# Altium PCB Preamp.PcbDoc
Units mm, origin at the board's own origin, x right, y up, seen from the top; angles counter-clockwise.
Board outline 152.4 x 101.6 mm, 2 copper layers (Top Layer, Bottom Layer); 34 components, 16 nets, 136 pads, 18 vias.
Unrouted connection lines stored in the file: 69.
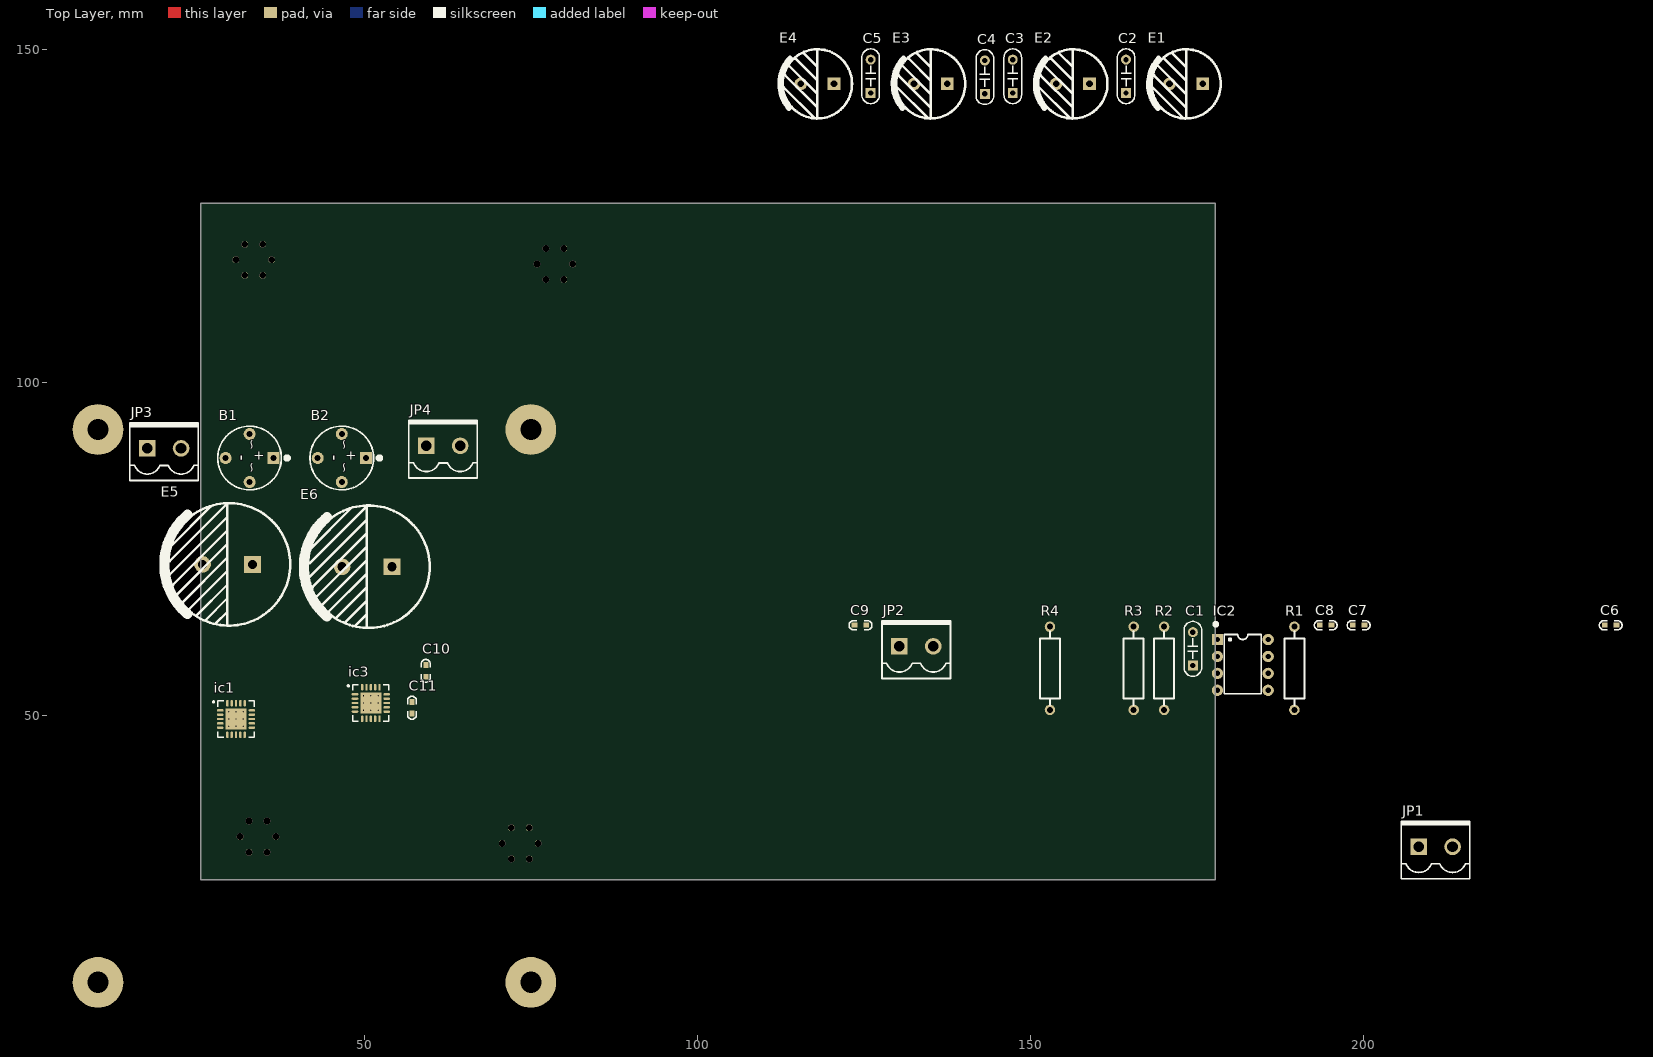
[diagram p0: Top Layer view]
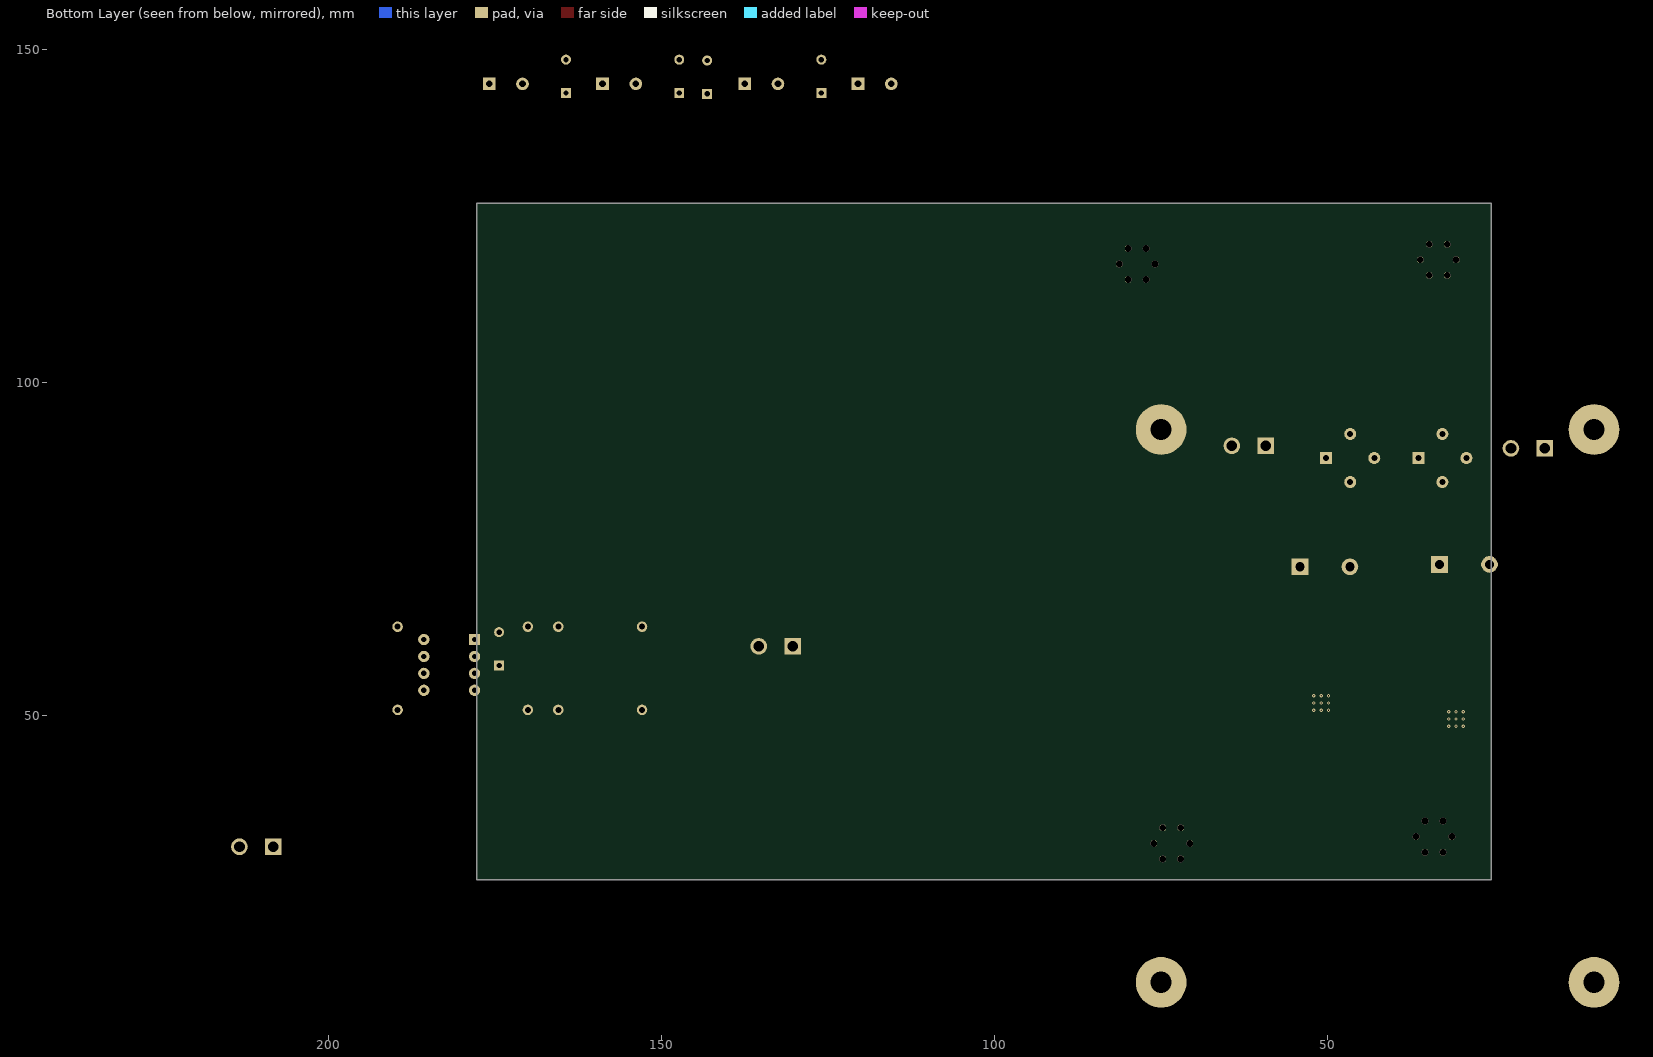
[diagram p1: Bottom Layer view, seen from below]

## Layer stack, top to bottom
Top Solder: solder mask 0.0102, Solder Resist, Dk 3.5
Top Layer: signal copper 0.0356
Dielectric 1: dielectric 0.32, FR-4, Dk 4.8
Bottom Layer: signal copper 0.0356
Bottom Solder: solder mask 0.0102, Solder Resist, Dk 3.5

## Board outline
25.4,25.4 177.8,25.4 177.8,127 25.4,127

## Design rules (kind name [scope] priority, off if disabled: settings)
Clearance [All] p1: gap=0.254 ignorepadtopadclearanceinfootprint=FALSE except(0: Arc-Hole Track-Hole SMDPad-Hole THPad-Hole Via-Hole Fill-Hole Poly-Hole Region-Hole Text-Hole)
PolygonConnect [All] p1: connectstyle=Relief reliefconductorwidth=0.254 reliefentries=4 polygonreliefangle="90 Angle" airgapwidth=0.254
RoutingVias [All] p1: holewidth=0.711 width=1.27 viastyle="Through Hole" minholewidth=0.711 minwidth=1.27 maxholewidth=0.711 maxwidth=1.27
SolderMaskExpansion [All] p1: expansion=0.102
Width [All] p1: maxlimit=0.254 minlimit=0.254 preferedwidth=0.254
30 further rules are at their usual default settings.

## Classes and differential pairs
component class Preamp: B1 B2 C1 C2 C3 C4 C5 C6 C7 C8 C9 C10 C11 E1 E2 E3 E4 E5 E6 ic1 IC2 ic3 JP1 JP2 JP3 JP4 R1 R2 R3 R4 ""

## Components (designator, comment, footprint, x,y, rotation, side; value= is the part's Value field where it differs from the comment)
* "M3" "M3 125X300"#1 33.401,118.491 r0 top
*1 "M3" "M3 125X300"#2 78.613,117.856 r0 top
*2 "M3" "M3 125X300"#3 34.036,31.877 r0 top
*3 "M3" "M3 125X300"#4 73.406,30.861 r0 top
B1 "2W10" RB-20 32.766,88.727 r270 top
B2 "2W10" RB-20 46.609,88.727 r270 top
C1 "0.1uF/275V" CBB-CL71 174.417,60.071 r90 top
C2 "0.1uF/275V" CBB-CL71 164.384,146.05 r90 top
C3 "0.1uF/275V" CBB-CL71 147.366,146.05 r90 top
C4 "0.1uF/275V" CBB-CL71 143.175,145.923 r90 top
C5 "0.1uF/275V" CBB-CL71 126.03,146.05 r90 top
C6 "104" "C 0603" 237.155,63.627 r0 top
C7 "104" "C 0603" 199.309,63.627 r0 top
C8 "104" "C 0603" 194.356,63.627 r0 top
C9 "104" "C 0603" 124.506,63.627 r0 top
C10 "104" "C 0603" 59.228,56.769 r90 top
C11 "104" "C 0603" 57.15,51.227 r90 top
E1 "10UF/6.3V" "CS 5.0*10*13 - C" 173.401,144.907 r0 top
E2 "10UF/6.3V" "CS 5.0*10*13 - C" 156.383,144.907 r0 top
E3 "10UF/6.3V" "CS 5.0*10*13 - C" 135.047,144.907 r0 top
E4 "10UF/6.3V" "CS 5.0*10*13 - C" 118.029,144.907 r0 top
E5 "10UF/16V" "CAP 7.5*18*35.5" 29.418,72.746 r180 top
E6 "10UF/16V" "CAP 7.5*18*35.5" 50.373,72.39 r180 top
ic1 "tps7a47" QFN65P500X500X100_HS-21N 30.734,49.53 r0 top
IC2 "OP07" DIP8-300 181.91,57.658 r0 top
ic3 "tps7a47" QFN65P500X500X100_HS-21N 50.973,51.943 r0 top
JP1 "HDR-1X2" KF2EDGK5.08-2P 208.326,30.353 r0 top
JP2 "HDR-1X2" KF2EDGK5.08-2P 130.348,60.452 r0 top
JP3 "HDR-1X2" KF2EDGK5.08-2P 17.399,90.17 r0 top
JP4 "HDR-1X2" KF2EDGK5.08-2P 59.309,90.551 r0 top
R1 "Rz" "RS 1/2W" 189.657,57.15 r90 top
R2 "Ri" "RS 1/2W" 170.099,57.15 r90 top
R3 "Ro" "RS 1/2W" 165.527,57.15 r90 top
R4 "Rg" "RS 1/2W" 152.954,57.15 r90 top

## Footprints (in the part's own frame and the unit in brackets; to place one, negate y for a bottom-side part, rotate by r counter-clockwise, add the part's x,y. Pads: shape width x height; smd on the part's side, far side on the other; paste and mask are expansions set on the pad)
"C 0603" [mil] "无极性贴片电容"
  rect 35x30 smd: 1(-35,0) 2(34,0)
  silkscreen extent -67,-26 67,26, body extent -31,-16 31,16, height 32
"CAP 7.5*18*35.5" [mm] "脚距7.5mm直径18mm高度35.5mm"
  rect 2.5x2.5 hole 1.4: 1(-3.78,0)
  round 2.5 hole 1.4: 2(3.72,0)
  silkscreen extent -9.45,-9.21 9.45,9.18, body extent -9,-9 9.01,9, height 35.54
CBB-CL71 [mm] "7.2mm*2.3mm*6.5mm(长*宽*高）"
  rect 1.5x1.5 hole 0.8: 1(-2.5,0)
  round 1.5 hole 0.8: 2(2.5,0)
  silkscreen extent -4.11,-1.32 4.11,1.32, body extent -3.6,-1.15 3.6,1.15, height 6.55
"CS 5.0*10*13 - C" [mm] "脚距5mm , 直径10mm , 高13mm"
  rect 1.9x1.9 hole 1: 1(2.5,0)
  round 1.9 hole 1: 2(-2.5,0)
  silkscreen extent -5.64,-5.2 5.2,5.2, body extent -5,-5 5,5, height 13.02
DIP8-300 [mm] "9.4*7.6*3.8(长宽高）"
  rect 1.7x1.7 hole 0.8: 1(-3.81,3.81)
  round 1.7 hole 0.8: 2(-3.81,1.27) 3(-3.81,-1.27) 4(-3.81,-3.81) 5(3.81,-3.81) 6(3.81,-1.27) 7(3.81,1.27) 8(3.81,3.81)
  silkscreen extent -4.32,-4.32 2.79,6.35, body extent -3.93,-4.7 3.93,4.7, height 4.5
KF2EDGK5.08-2P [mm] "直列插拔式端子"
  rect 2.5x2.5 hole 1.6: 1(0,0)
  round 2.5 hole 1.6: 2(5.08,0)
  silkscreen extent -2.62,-4.83 7.67,3.81, body extent -2.54,-4.75 7.62,3.75, height 11.25
"M3 125X300"#1 [mil] "M3螺丝孔，孔125Mil，焊盘300Mil"
  round 300 hole 125: 1(-921.3,-1003.58)
  round 40 hole 40: 6(-106,0) 7(-53,-91.8) 8(53,-91.8) 9(106,0) 10(53,91.8) 11(-53,91.8)
"M3 125X300"#2 [mil] "M3螺丝孔，孔125Mil，焊盘300Mil"
  round 300 hole 125: 1(-142.24,-978.58)
  round 40 hole 40: 6(-106,0) 7(-53,-91.8) 8(53,-91.8) 9(106,0) 10(53,91.8) 11(-53,91.8)
"M3 125X300"#3 [mil] "M3螺丝孔，孔125Mil，焊盘300Mil"
  round 300 hole 125: 1(-946.3,-861.3)
  round 40 hole 40: 6(-106,0) 7(-53,-91.8) 8(53,-91.8) 9(106,0) 10(53,91.8) 11(-53,91.8)
"M3 125X300"#4 [mil] "M3螺丝孔，孔125Mil，焊盘300Mil"
  round 300 hole 125: 1(62.76,-821.3)
  round 40 hole 40: 6(-106,0) 7(-53,-91.8) 8(53,-91.8) 9(106,0) 10(53,91.8) 11(-53,91.8)
QFN65P500X500X100_HS-21N [mm] "QFN, 20-Leads, Body 5.00x5.00mm, Pitch 0.65mm, Thermal Pad 3.15x3.15mm, IPC Medium Density"
  oval 1x0.35 smd: 1(-2.375,1.3) 2(-2.375,0.65) 3(-2.375,0) 4(-2.375,-0.65) 5(-2.375,-1.3) 11(2.375,-1.3) 12(2.375,-0.65) 13(2.375,0) 14(2.375,0.65) 15(2.375,1.3)
  oval 0.35x1 smd: 6(-1.3,-2.375) 7(-0.65,-2.375) 8(0,-2.375) 9(0.65,-2.375) 10(1.3,-2.375) 16(1.3,2.375) 17(0.65,2.375) 18(0,2.375) 19(-0.65,2.375) 20(-1.3,2.375)
  rect 3.15x3.15 smd: 21(0,0)
  silkscreen extent -3.5,-2.73 2.73,2.72, body extent -2.57,-2.58 2.58,2.57, height 1
RB-20 [mm] "8.9*3.5mm(直径，高)"
  round 1.8 hole 0.9: AC1(3.606,0) AC2(-3.606,0) DC-(0,-3.606)
  rect 1.8x1.8 hole 0.9: DC+(0,3.606)
  silkscreen extent -4.77,-4.77 4.77,5.89, body extent -4.62,-4.62 4.63,4.63, height 5.35
"RS 1/2W" [mm] "直插色环电阻，脚距12.5mm，直径3mm"
  round 1.575 hole 0.9: 1(-6.25,0) 2(6.25,0)
  silkscreen extent -5.5,-1.5 5.5,1.5, body extent -6.5,-1.51 6.5,1.51, height 3.11

## Part data
* *1 *2 *3: "?琖ふ", BOM¦W?=?琖ふ, ???方=www.ooocke.com, ª©???=·½?«È
B1 B2: "1KV/2A整流桥"
C1 C2 C3 C4 C5: library part C-CBB, "CBB电容", BOM名称=CBB电容, 版权归属=源创客, 学习资源=www.ooocke.com
C6 C7 C8 C9 C10 C11: library part C, "无极性贴片电容"
E1 E2 E3 E4: library part C-CS, "直插固态电容"
E5 E6: library part C-CAP, "直插电解电容"
ic1 ic3: "TI RF LDO Voltage Regulator", Supplier 1=Arrow
IC2: "?路精密?放", BOM¦W?=?路精密?放, ???方=www.ooocke.com, ª©???=·½?«È
JP1 JP2 JP3 JP4: library part "Header 2", "2P接插件", BOM名称=2P接插件, 版权归属=源创客, 学习资源=www.ooocke.com
R1 R2 R4: library part R-CRR, "直插色环电阻"
R3: library part R-CRR

## Via types
v1: diameter 0.5, hole 0.2, Top Layer to Bottom Layer, 18 vias

## Nets (pads, with @x,y where several pads share a name; then routed paths per layer and width w, separated by ;. In a path a pad name is that pad's centre, name@x,y a point inside that pad or via, vN(x,y) a via of type N, cw(c..) or ccw(c..) an arc to the next point about the centre after c; other vN are vias at no path point)
+15: C2.1 C3.1 C8.2 E3.1 E4.1 ic1.1 ic1.20 IC2.7
-15: B2.DC- C4.1 C5.1 C9.1 C10.1 C11.1 E1.2 E2.2 E6.2 IC2.4 ic3.7 ic3.17 ic3.18 ic3.19 ic3.21
  other v1: 49.873,50.843 50.973,50.843 52.073,50.843 49.873,51.943 50.973,51.943 52.073,51.943 49.873,53.043 50.973,53.043 52.073,53.043
GND: B1.DC- C1.2 C2.2 C3.2 C4.2 C5.2 C6.1 C7.1 C8.1 C9.2 E1.1 E2.1 E3.2 E4.2 E5.2 ic1.7 ic1.17 ic1.18 ic1.19 ic1.21 ic3.1 ic3.20 JP1.2 JP2.2 R1.2 R4.1
  other v1: 29.634,48.43 30.734,48.43 31.834,48.43 29.634,49.53 30.734,49.53 31.834,49.53 29.634,50.63 30.734,50.63 31.834,50.63
NetB1_AC1: B1.AC1 JP3.1
NetB1_AC2: B1.AC2 JP3.2
NetB1_DC+: B1.DC+ C6.2 E5.1 ic1.13 ic1.15 ic1.16
NetB2_AC1: B2.AC1 JP4.1
NetB2_AC2: B2.AC2 JP4.2
NetB2_DC+: B2.DC+ C10.2 E6.1 ic3.13 ic3.15 ic3.16
NetC1_1: C1.1 IC2.3 R2.2
NetC7_2: C7.2 ic1.14
NetC11_2: C11.2 ic3.14
NetIC2_2: IC2.2 R4.2
NetIC2_6: IC2.6 R3.1
NetJP1_1: JP1.1 R1.1 R2.1
NetJP2_1: JP2.1 R3.2
pads on no net: *1.1 *1.6 *1.7 *1.8 *1.9 *1.10 *1.11 *2.1 *2.6 *2.7 *2.8 *2.9 *2.10 *2.11 *3.1 *3.6 *3.7 *3.8 *3.9 *3.10 *3.11 *.1 *.6 *.7 *.8 *.9 *.10 *.11 ic1.2 ic1.3 ic1.4 ic1.5 ic1.6 ic1.8 ic1.9 ic1.10 ic1.11 ic1.12 IC2.1 IC2.5 IC2.8 ic3.2 ic3.3 ic3.4 ic3.5 ic3.6 ic3.8 ic3.9 ic3.10 ic3.11 ic3.12

## Text inside footprints (layer, text, board x,y; h text height)
B1: Top Overlay "~" at 32.004,86.441 h2.54 r270; Top Overlay "~" at 32.004,89.87 h2.54 r270; Top Overlay "-" at 30.353,88.346 h3.05 r270; Top Overlay "+" at 35.052,87.965 h2.54
B2: Top Overlay "~" at 45.847,86.441 h2.54 r270; Top Overlay "~" at 45.847,89.87 h2.54 r270; Top Overlay "-" at 44.196,88.346 h3.05 r270; Top Overlay "+" at 48.895,87.965 h2.54